# Altium PCB TK106_MIDI_Konnektorer.PcbDoc
Units mm, origin at the board's own origin, x right, y up, seen from the top; angles counter-clockwise.
Board outline 60 x 100 mm, 2 copper layers (Top Layer, Bottom Layer); 32 components, 21 nets, 125 pads, 2 vias.
Unrouted connection lines stored in the file: 51.
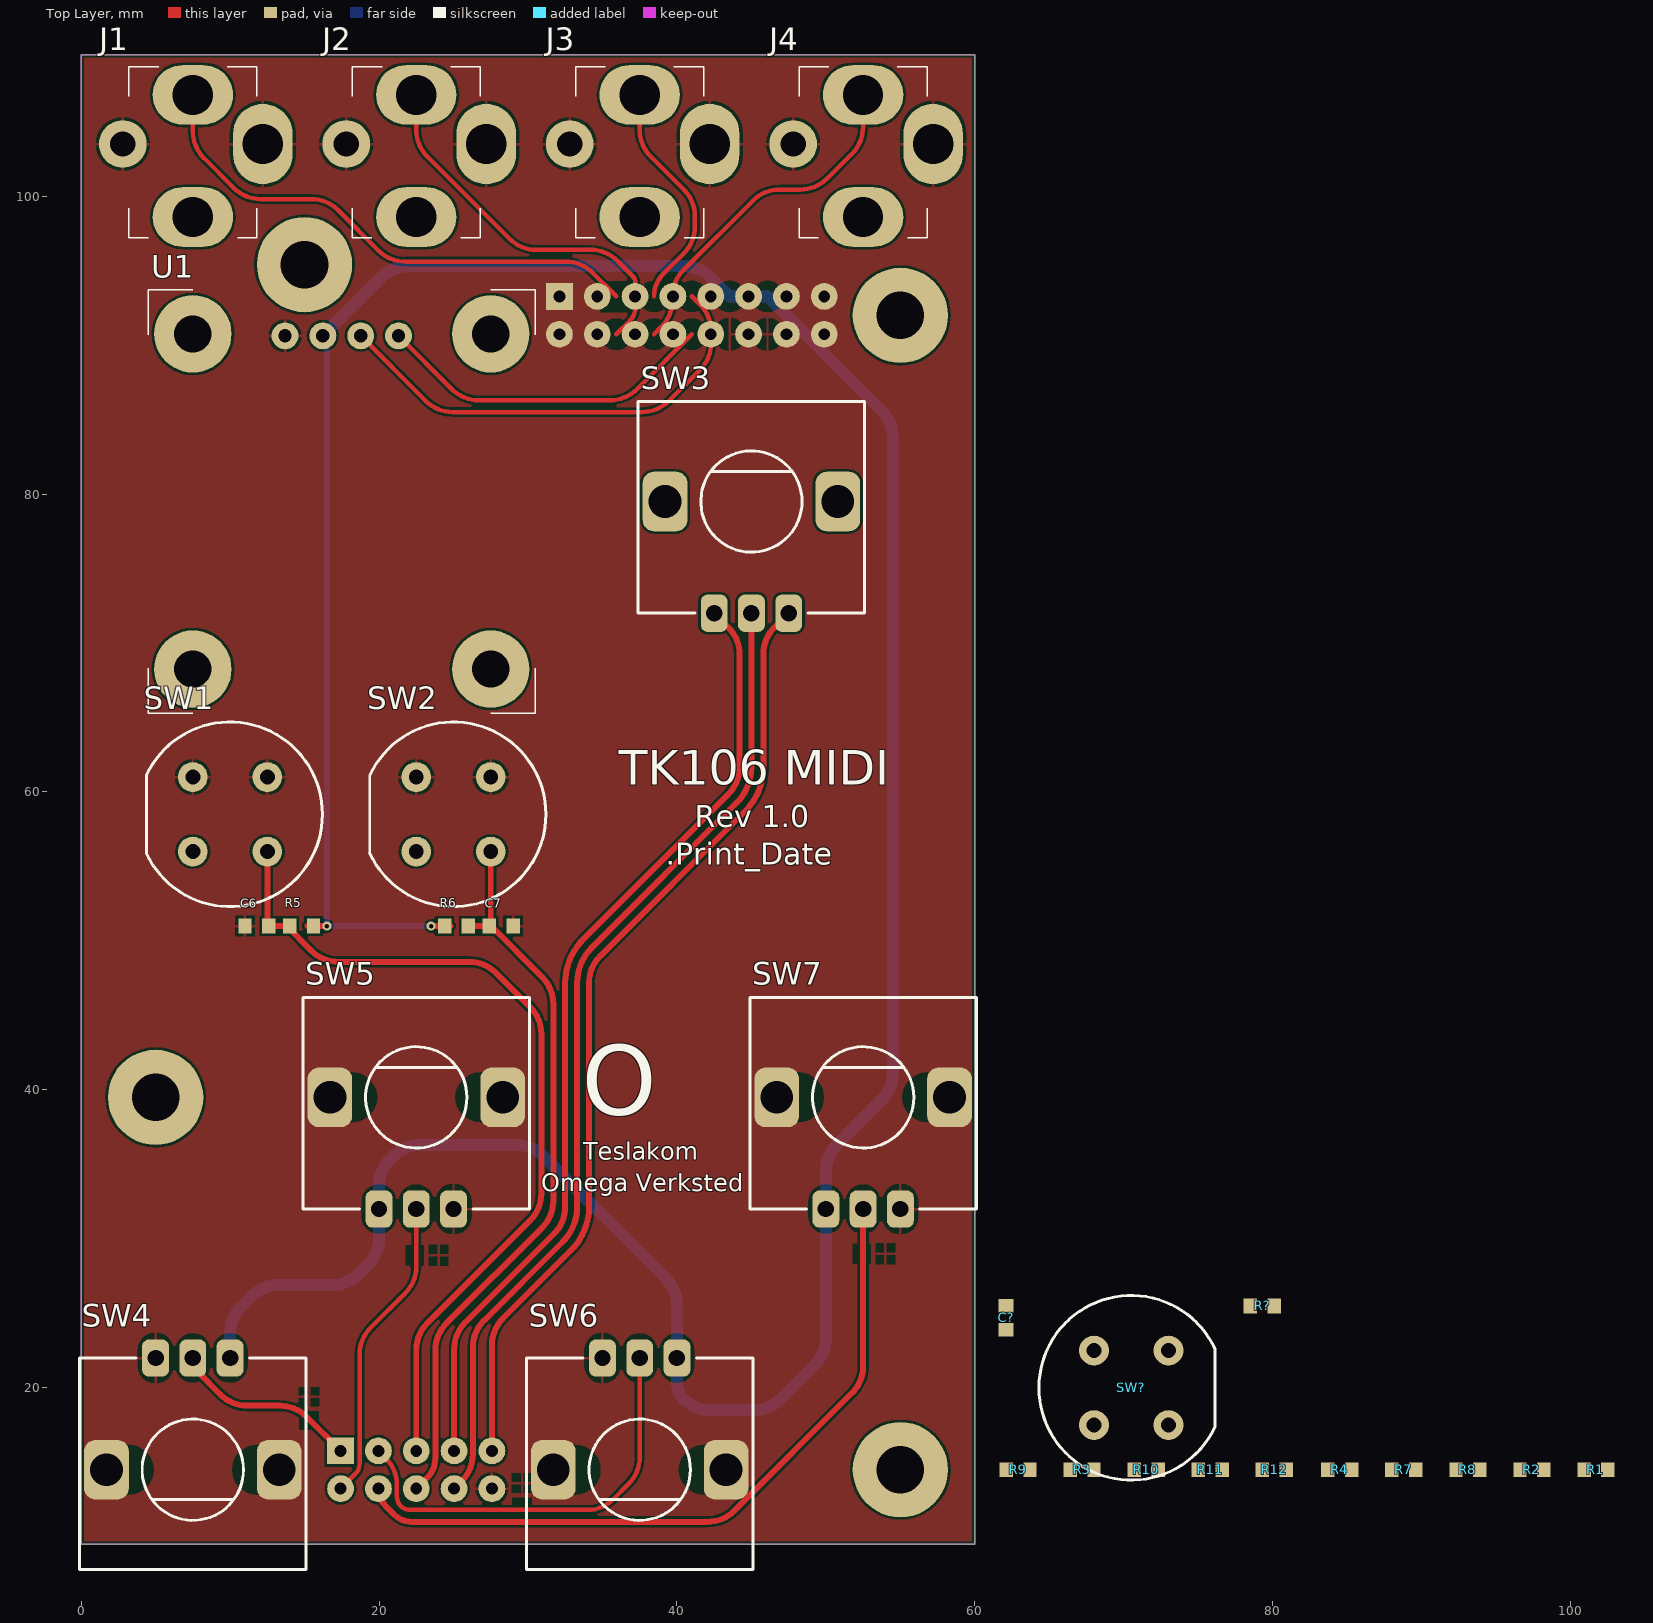
[diagram p0: Top Layer view]
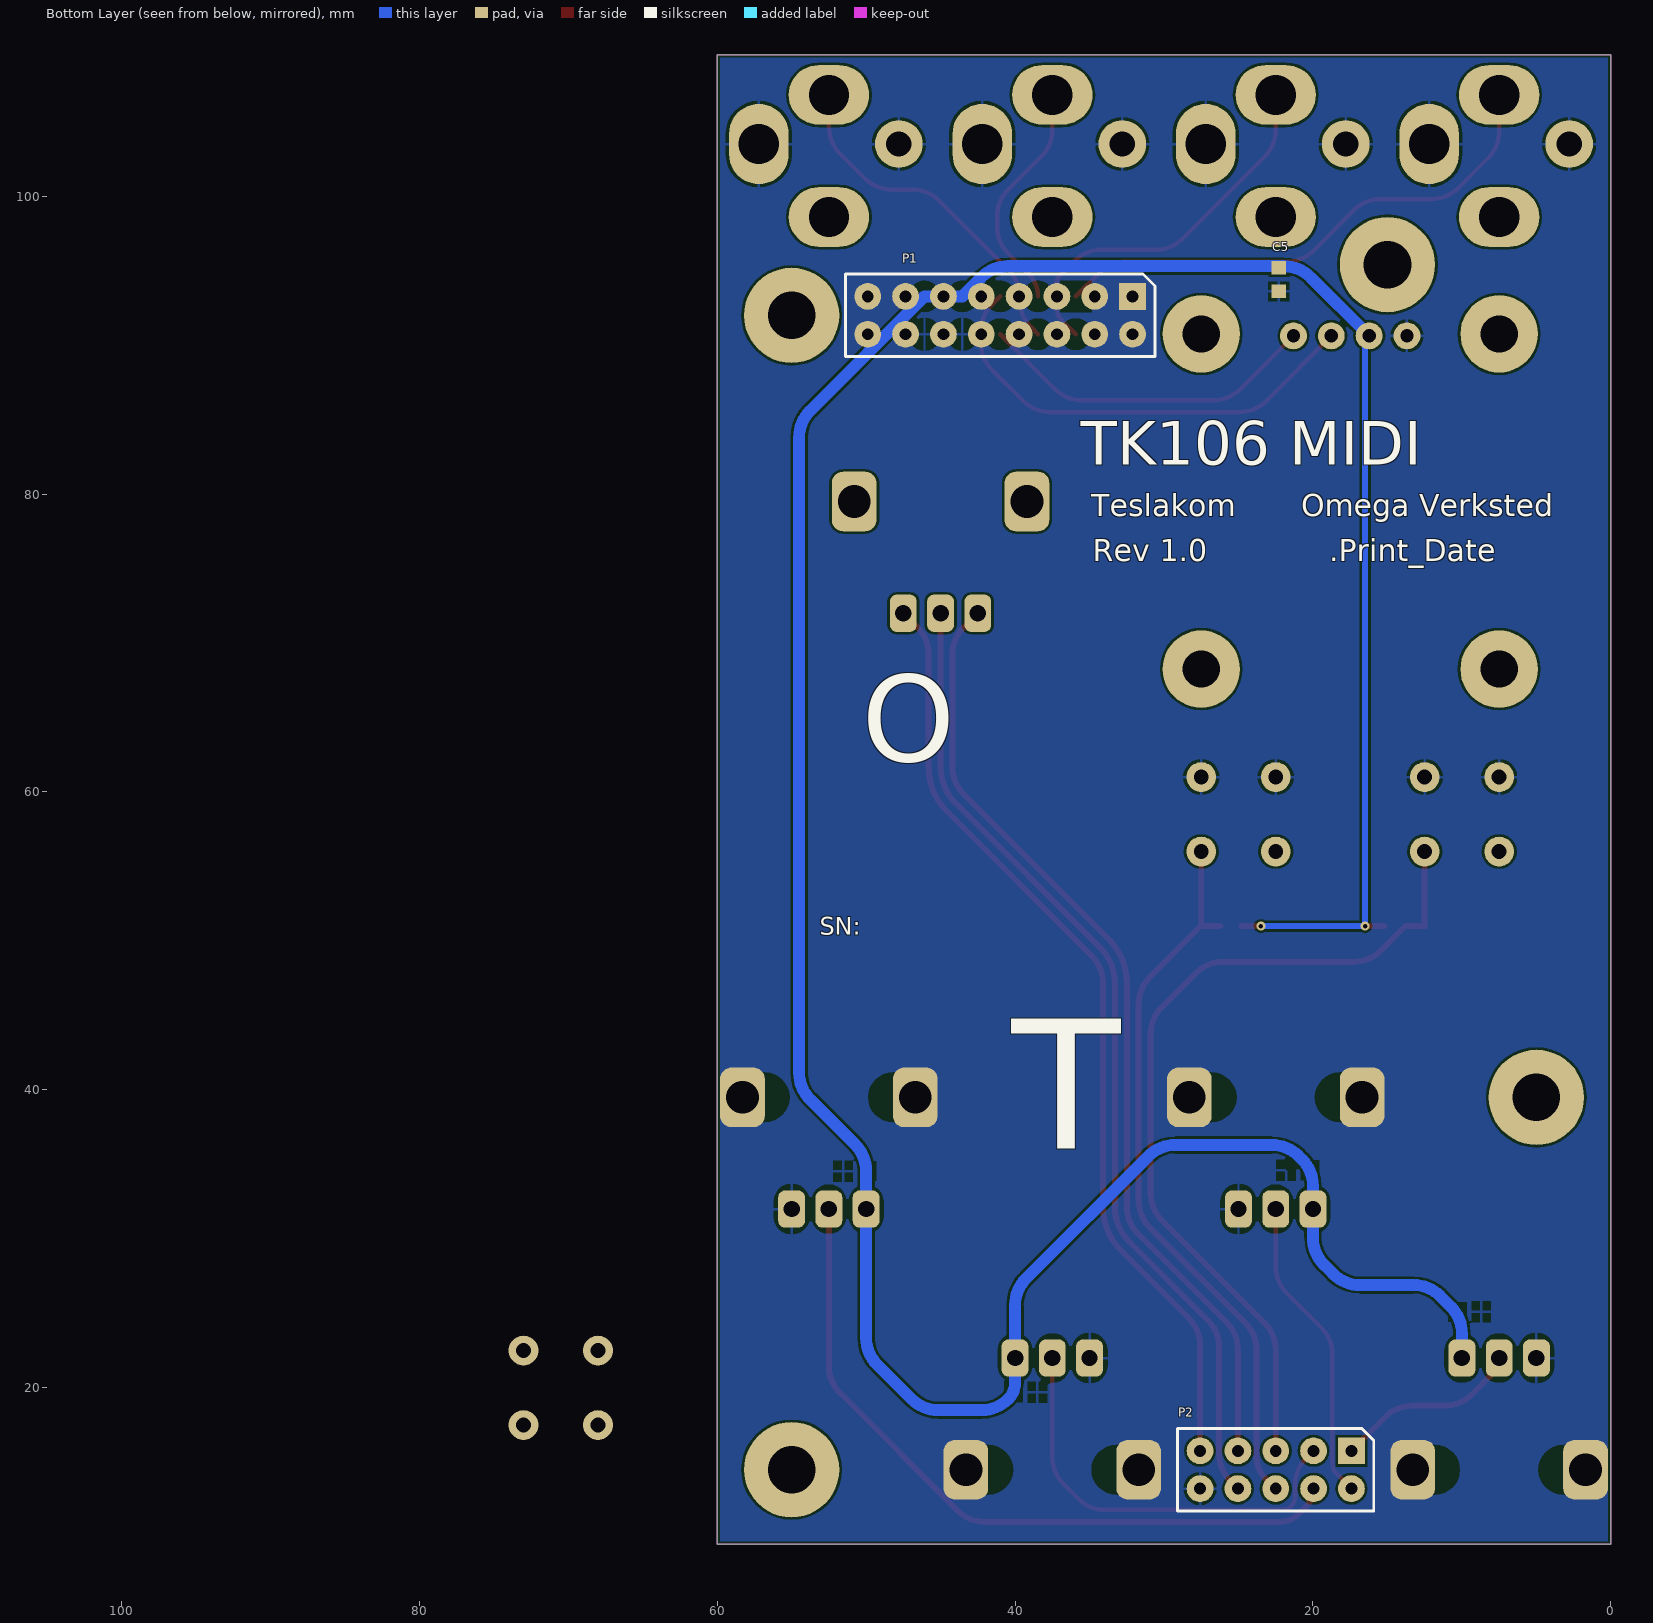
[diagram p1: Bottom Layer view, seen from below]

## Layer stack, top to bottom
Top Solder: solder mask 0.0102, Solder Resist, Dk 3.5
Top Layer: signal copper 0.0356
Dielectric 1: dielectric 0.32, FR-4, Dk 4.8
Bottom Layer: signal copper 0.0356
Bottom Solder: solder mask 0.0102, Solder Resist, Dk 3.5

## Board outline
0,9.5 0,109.5 60,109.5 60,9.5

## Design rules (kind name [scope] priority, off if disabled: settings)
Clearance [All] p1: gap=0.16 ignorepadtopadclearanceinfootprint=FALSE except(0: Arc-Text Arc-Hole Track-Text Track-Hole SMDPad-Text SMDPad-Hole THPad-Text THPad-Hole Via-Text Via-Hole Fill-Text Fill-Hole Poly-Text Poly-Hole Region-Text Region-Hole Text-Text Text-Hole)
Height [All] p1: minheight=0 maxheight=200 prefheight=12.7
HoleSize [All] p1: absolutevalues=TRUE maxlimit=6.35 minlimit=0.3 maxpercent=80.000 minpercent=20.000
MinimumSolderMaskSliver [All] p1: minsoldermaskwidth=0.1
PlaneClearance [All] p1: clearance=1
PlaneConnect [All] p1: planeconnectstyle=Relief reliefexpansion=0.508 reliefentries=4 reliefconductorwidth=1 reliefairgap=0.254
PolygonConnect PolygonConnect_1 [IsVia] p1: connectstyle=Direct reliefconductorwidth=0.254 reliefentries=4 polygonreliefangle="90 Angle" airgapwidth=0.254
PolygonConnect [All] p2: connectstyle=Relief reliefconductorwidth=0.2 reliefentries=4 polygonreliefangle="90 Angle" airgapwidth=0.2
RoutingVias [All] p1: holewidth=0.3 width=0.6 viastyle="Through Hole" minholewidth=0.3 minwidth=0.6 maxholewidth=6.35 maxwidth=10
SilkToSolderMaskClearance [IsPad] p1: minsilkscreentomaskgap=0.178 clearancetoexposedcopper=TRUE
SolderMaskExpansion [All] p1: expansion=0.1 istentingtop=FALSE
Width [All] p1: maxlimit=10 minlimit=0.16 preferedwidth=0.4
24 further rules are at their usual default settings.

## Components (designator, comment, footprint, x,y, rotation, side; value= is the part's Value field where it differs from the comment)
C5 "100nF" CAPC0603(1608)55_N 22.3,94.404 r90 bottom
C6 "100nF" CAPC0603(1608)55_N 11.8,51 r0 top
C7 "100nF" CAPC0603(1608)55_N 28.2,51 r180 top
C? "100nF" CAPC0603(1608)55_N 62.099,24.7 r270 top
J1 "3.5mm jack" PJ301BM 7.5,103.5 r180 top
J2 "3.5mm jack" PJ301BM 22.5,103.5 r180 top
J3 "3.5mm jack" PJ301BM 37.5,103.5 r180 top
J4 "3.5mm jack" PJ301BM 52.5,103.5 r180 top
P1 "Header2x8" HDRV16W64P254_2X8 41,92 r270 bottom
P2 "Header2x5" HDRV10W64P254_2X5 22.5,14.5 r270 bottom
R1 "10k" RESC0603(1608)_N 101.699,14.5 r180 top
R2 "10k" RESC0603(1608)_N 97.399,14.5 r180 top
R3 "10k" RESC0603(1608)_N 67.199,14.5 r180 top
R4 "10k" RESC0603(1608)_N 84.499,14.5 r180 top
R5 "10k" RESC0603(1608)_N 14.8,51 r0 top
R6 "10k" RESC0603(1608)_N 25.2,51 r180 top
R7 "10k" RESC0603(1608)_N 88.799,14.5 r180 top
R8 "10k" RESC0603(1608)_N 93.099,14.5 r180 top
R9 "10k" RESC0603(1608)_N 62.899,14.5 r180 top
R10 "10k" RESC0603(1608)_N 71.499,14.5 r180 top
R11 "10k" RESC0603(1608)_N 75.799,14.5 r180 top
R12 "10k" RESC0603(1608)_N 80.099,14.5 r180 top
R? "10k" RESC0603(1608)_N 79.299,25.5 r180 top
SW1 "D6R90LFS" CK_D6R 10,58.5 r0 top
SW2 "D6R90LFS" CK_D6R 25,58.5 r0 top
SW3 "Rotary Encoder" RotaryEncoder 45,79.5 r0 top
SW4 "Rotary Encoder" RotaryEncoder 7.5,14.5 r180 top
SW5 "Rotary Encoder" RotaryEncoder 22.5,39.5 r0 top
SW6 "Rotary Encoder" RotaryEncoder 37.5,14.5 r180 top
SW7 "Rotary Encoder" RotaryEncoder 52.5,39.5 r0 top
SW? "D6R90LFS" CK_D6R 70.499,20 r180 top
U1 "Oled Display" OLED_SSD1306_I2C 17.5,79.5 r0 top

## Footprints (in the part's own frame and the unit in brackets; to place one, negate y for a bottom-side part, rotate by r counter-clockwise, add the part's x,y. Pads: shape width x height; smd on the part's side, far side on the other; paste and mask are expansions set on the pad)
CAPC0603(1608)55_N [mm] "Chip Capacitor, Body 1.6x0.8mm, Height 0.55mm, IPC Medium Density"
  rect 0.9x1 smd: 1(-0.8,0) 2(0.8,0)
  body extent -0.87,-0.48 0.88,0.47, height 0.55
CK_D6R [mm]
  round 2 hole 1 paste+0: 1(-2.5,2.5) 2(2.5,2.5) 3(-2.5,-2.5) 4(2.5,-2.5)
  silkscreen extent -5.63,-6.2 6.2,6.2, body extent -6,-6 6,6, height 14.3
HDRV10W64P254_2X5 [mm] "Header 2x5"
  rect 1.8x1.8 hole 0.8: 1(-1.27,5.08)
  round 1.8 hole 0.8: 2(1.27,5.08) 3(-1.27,2.54) 4(1.27,2.54) 5(-1.27,0) 6(1.27,0) 7(-1.27,-2.54) 8(1.27,-2.54) 9(-1.27,-5.08) 10(1.27,-5.08)
  silkscreen extent -2.77,-6.6 2.77,6.58, body extent -2.54,-6.35 2.54,6.35, height 8.38
HDRV16W64P254_2X8 [mm] "Header 2x8"
  rect 1.8x1.8 hole 0.8: 1(-1.27,8.89)
  round 1.8 hole 0.8: 2(1.27,8.89) 3(-1.27,6.35) 4(1.27,6.35) 5(-1.27,3.81) 6(1.27,3.81) 7(-1.27,1.27) 8(1.27,1.27) 9(-1.27,-1.27) 10(1.27,-1.27) 11(-1.27,-3.81) 12(1.27,-3.81) 13(-1.27,-6.35) 14(1.27,-6.35) 15(-1.27,-8.89) 16(1.27,-8.89)
  silkscreen extent -2.77,-10.39 2.77,10.39, body extent -2.54,-10.16 2.54,10.16, height 8.38
OLED_SSD1306_I2C [mm]
  round 1.8 hole 0.9 paste+0: 1(-3.81,11.12) 2(-1.27,11.12) 3(1.27,11.12) 4(3.81,11.12)
  round 5.2 hole 2.5 paste+0: ""(-10,-11.25) ""(-10,11.25) ""(10,-11.25) ""(10,11.25)
  silkscreen extent -13,-14.2 13,14.2, body extent -12.5,-13.5 12.5,12.5, height 3.6
PJ301BM [mm]
  oval 4x5.4 hole 2.7 paste+0: 1(-4.7,0)
  round 3.2 hole 1.7 paste+0: 1(4.7,0)
  oval 5.4x4 hole 2.7 paste+0: 2(0,-3.3) 3(0,4.9)
  silkscreen extent -4.3,-5.2 4.3,6.3, body extent -4.9,-4.9 4.9,6, height 16
RESC0603(1608)_N [mm] "Chip Resistor, Body 1.6x0.8mm, IPC Medium Density"
  rect 0.9x1 smd: 1(-0.8,0) 2(0.8,0)
  body extent -0.85,-0.47 0.85,0.47, height 0.6
RotaryEncoder [mm] "ALPS rotary encoder  EC12E2430804"
  rrect50% 1.8x2.5 hole 1.1: 1(0,-7.5) 2(-2.5,-7.5) 3(2.5,-7.5)
  rrect50% 3x4 hole 2.2: 4(-5.8,0) 4(5.8,0)
  silkscreen extent -7.6,-7.5 7.6,6.7, body extent -7,-7.65 7,6.6, height 20.05

## Part data
C5 C6 C7 C?: library part 5152, "X7R 50V 5%", antall=1000, dybde=0, hylle=0, id=5152, komponenttype=2, lager_type=Baklager, leverandor=Farnell, leverandor_varenr=1759122, navn=100nF, nokkelord="Kondensator, Capacitor, CAP", pakke_opprettet="18/02/2015 14:18:13", pakke_opprettet_av=815, pakketype=0603, pris=1, produsent=Multikomp, rad=21, rom=OV, symbol_opprettet="14/11/2014 20:19:34", symbol_opprettet_av=815
J1 J2 J3 J4: library part 4712, "3-pin 3.5mm 1/8\" Mono Jack PCB Panel Mount", beskrivelse="3.5mm Mono jack", id=4712, komponenttype=11, navn=PJ301BM, nokkelord=eurorack, pakke_opprettet="26/06/2019 21:29:25", pakke_opprettet_av=815, pakketype=TH, pris=0, symbol_opprettet="26/06/2019 21:41:38", symbol_opprettet_av=815
P1: library part 4618, beskrivelse=Header, id=4618, komponenttype=11, navn="Header 2X8", nokkelord=Header, pakke_opprettet="14.02.2019 23:39:55", pakke_opprettet_av=815, pakketype=TH, pris=10, symbol_opprettet="13.11.2014 11:08:32", symbol_opprettet_av=815
P2: library part 5660, beskrivelse=Header, id=5660, komponenttype=11, navn="Header 2X5", nokkelord=Header, pakke_opprettet="31/01/2020 22:00:52", pakke_opprettet_av=815, pakketype=TH, pris=5, symbol_opprettet="13/11/2014 11:03:55", symbol_opprettet_av=815
R1 R2 R3 R4 R5 R6 R7 R8 R9 R10 R11 R12 R?: library part 5264, "0.1W 1% Thick film resistor", antall=1200, dybde=3, hylle=6, id=5264, komponenttype=1, lager_type=Baklager, leverandor=Farnell, leverandor_varenr=2447230, navn=10k, nokkelord="Resistor Motstand", pakke_opprettet="08/07/2014 21:15:30", pakke_opprettet_av=815, pakketype=0603, pris=0, produsent=Multikomp, rad=1, rom=OV, symbol_opprettet="08/07/2014 21:16:33", symbol_opprettet_av=815
SW1 SW2 SW?: library part 4720, "Tactile Switch, D6 Series, Top Actuated, Through Hole, Round Button, 130 gf, 100mA", id=4720, leverandor=Farnell, leverandor_varenr=1201375, navn=D6R90LFS, pakke_opprettet="27/06/2019 21:16:30", pakke_opprettet_av=815, pris=8, produsent=C&K, symbol_opprettet="14/11/2014 21:57:30", symbol_opprettet_av=815
SW3 SW4 SW5 SW6 SW7: library part 4370, "EC12E2430804 Incremental rotary encoder", id=4370, leverandor=Farnell, leverandor_varenr=2065070, navn="Rotary Encoder", pakke_opprettet="03/11/2017 13:12:58", pakke_opprettet_av=1150, pakketype=TH, pris=15, produsent=Alps, symbol_opprettet="03/11/2017 13:12:00", symbol_opprettet_av=1150
U1: library part 4719, "White 3-5V 0.96\"I2C Serial 128X64 OLED LCD LED Display Module for Arduino. Driver: SSD1306, gm009605v4", antall=16, dybde=0, hylle=4, id=4719, lager_type=Baklager, navn="Oled Display", nokkelord="I2C, Serial, 128X64, OLED, Display", pakke_opprettet="26/06/2019 22:49:09", pakke_opprettet_av=815, pakketype=-, pris=20, rad=6, rom=OV, symbol_opprettet="26/06/2019 22:55:07", symbol_opprettet_av=815

## Free pads (board coordinates)
  round 6.4 hole 3.2 unplated: 0(5,39.5) 0(15,95.4) 0(55,14.5) 0(55,92)

## Via types
v1: diameter 0.6, hole 0.3, Top Layer to Bottom Layer, tented both sides, 2 vias

## Nets (pads, with @x,y where several pads share a name; then routed paths per layer and width w, separated by ;. In a path a pad name is that pad's centre, name@x,y a point inside that pad or via, vN(x,y) a via of type N, cw(c..) or ccw(c..) an arc to the next point about the centre after c; other vN are vias at no path point)
BTN_CANCEL: C7.2 P1.14 R6.1 SW2.4 | length 49.2
  Top Layer w0.4: 22.5,13.23 23.24,13.97 ccw(c21.936,15.274) 23.78,15.274 23.78,22.528 cw(c26.32,22.528) 24.524,24.324 30.956,30.756 ccw(c29.16,32.552) 31.7,32.552 31.7,45.773 ccw(c29.16,45.773) 30.956,47.569 C7.2@27.525,51 ; R6.1@26.2,51 C7.2@27.525,51 ; SW2.4 27.5,51.06 ccw(c27.585,51.06) C7.2@27.525,51
BTN_MUTE: C?.2 P1.12 R?.1 SW?.4
BTN_OK: C6.2 P1.16 R5.1 SW1.4 | length 58
  Top Layer w0.4: SW1.4 12.5,51.06 cw(c12.415,51.06) 12.475,51 13.8,51 15.456,49.344 ccw(c17.252,51.14) 17.252,48.6 26.048,48.6 cw(c26.048,46.06) 27.844,47.856 30.156,45.544 cw(c28.36,43.748) 30.9,43.748 30.9,33.052 cw(c28.36,33.052) 30.156,31.256 23.244,24.344 ccw(c25.04,22.548) 22.5,22.548 22.5,15.77
ENC_A: P1.11 R1.1 SW3.2 | length 64.3
  Top Layer w0.4: 25.04,15.77 25.04,22.588 cw(c27.58,22.588) 25.784,24.384 31.756,30.356 ccw(c29.96,32.152) 32.5,32.152 32.5,47.185 cw(c36.64,47.185) 33.713,50.113 43.456,59.856 ccw(c41.66,61.652) 44.2,61.652 44.2,69.248 ccw(c41.66,69.248) 43.456,71.044 SW3.2
ENC_ATTACK_A: P2.1 R3.1 SW4.2
ENC_ATTACK_B: P2.3 R9.1 SW4.3
ENC_B: P1.13 R2.1 SW3.3 | length 63.8
  Top Layer w0.4: 27.58,15.77 27.58,22.865 cw(c30.12,22.865) 28.324,24.661 32.887,29.225 ccw(c29.96,32.152) 34.1,32.152 34.1,47.185 cw(c36.64,47.185) 34.844,48.981 44.587,58.725 ccw(c41.66,61.652) 45.8,61.652 45.8,69.248 cw(c48.34,69.248) 46.544,71.044 SW3.3
ENC_DECAY_A: P2.5 R4.1 SW5.2
ENC_DECAY_B: P2.7 R10.1 SW5.3
ENC_RELEASE_A: P2.8 R8.1 SW7.2
ENC_RELEASE_B: P2.6 R12.1 SW7.3
ENC_SUSTAIN_A: P2.9 R7.1 SW6.2
ENC_SUSTAIN_B: P2.10 R11.1 SW6.3
GND: C5.1 C6.1 C7.1 C?.1 J1.1 J2.1 J3.1 J4.1 P1.8 P1.10 P2.2 SW1.1 SW1.2 SW2.1 SW2.2 SW3.1 SW4.1 SW5.1 SW6.1 SW7.1 SW?.1 SW?.2 U1.1 | length 20.6
  Top Layer w0.3: P2.2 18.411,14.221 ccw(c17.712,14.919) 18.7,14.919 18.7,22.248 cw(c21.24,22.248) 19.444,24.044 21.756,26.356 ccw(c19.96,28.152) 22.5,28.152 SW5.1
OUT_1: J1.2 P1.1 | length 35.5
  Top Layer w0.3: J1.2 7.5,104.352 ccw(c10.04,104.352) 8.244,102.556 10.256,100.544 ccw(c12.052,102.34) 12.052,99.8 15.462,99.8 cw(c15.462,97.26) 17.258,99.056 19.97,96.344 ccw(c21.766,98.14) 21.766,95.6 32.538,95.6 cw(c32.538,93.06) 34.334,94.856 35.92,93.27
OUT_2: J2.2 P1.2 | length 25.7
  Top Layer w0.3: J2.2 22.5,104.452 ccw(c25.04,104.452) 23.244,102.656 28.756,97.144 ccw(c30.552,98.94) 30.552,96.4 34.204,96.4 cw(c34.204,93.86) 36,95.656 37.063,94.593 cw(c36.734,94.263) 37.2,94.263 37.2,92.465 cw(c36.102,92.465) 36.879,91.689 35.92,90.73
OUT_3: J3.2 P1.3 | length 15.8
  Top Layer w0.3: J3.2 37.5,104.452 ccw(c40.04,104.452) 38.244,102.656 40.456,100.444 cw(c38.66,98.648) 41.2,98.648 41.2,97.952 cw(c38.66,97.952) 40.456,96.156 39.089,94.789 ccw(c40.609,93.27) 38.46,93.27
OUT_4: J4.2 P1.4 | length 23.4
  Top Layer w0.3: 38.46,90.73 38.956,91.226 ccw(c37.16,93.022) 39.7,93.022 39.7,93.27 cw(c42.187,93.27) 40.428,95.028 45.1,99.7 cw(c46.896,97.904) 46.896,100.444 48.292,100.444 ccw(c48.292,102.984) 50.088,101.188 51.756,102.856 ccw(c49.96,104.652) 52.5,104.652 J4.2
SCK: P1.5 U1.3 | length 31.4
  Top Layer w0.3: U1.3 23.146,86.244 ccw(c24.942,88.04) 24.942,85.5 37.648,85.5 ccw(c37.648,88.04) 39.444,86.244 41.556,88.356 ccw(c39.76,90.152) 42.3,90.152 42.3,90.918 ccw(c39.76,90.918) 41.556,92.714 41,93.27
SDA: P1.6 U1.4 | length 23.1
  Top Layer w0.3: U1.4 24.886,87.044 ccw(c26.682,88.84) 26.682,86.3 35.518,86.3 ccw(c35.518,88.84) 37.314,87.044 41,90.73
VCC_P5V0: C5.2 P1.7 P1.9 R1.2 R2.2 R3.2 R4.2 R5.2 R6.2 R7.2 R8.2 R9.2 R10.2 R11.2 R12.2 R?.2 U1.2 | length 220.2
  Top Layer w0.4: R5.2@15.2,51 v1(16.5,51) ; v1(23.5,51) R6.2@24.8,51
  Bottom Layer w0.4: U1.2 cw(c15.578,89.968) 16.5,89.968 v1(16.5,51) v1(23.5,51)
  Bottom Layer w0.8: 10,22 10,23.648 cw(c12.54,23.648) 10.744,25.444 11.456,26.156 cw(c13.252,24.36) 13.252,26.9 16.848,26.9 ccw(c16.848,29.44) 18.644,27.644 19.256,28.256 ccw(c17.46,30.052) 20,30.052 20,32 20,33.548 cw(c22.54,33.548) 20.744,35.344 20.956,35.556 cw(c22.752,33.76) 22.752,36.3 29.248,36.3 cw(c29.248,33.76) 31.044,35.556 39.256,27.344 cw(c37.46,25.548) 40,25.548 40,22 40,20.345 ccw(c41.557,20.345) 40.456,19.244 ccw(c42.252,21.04) 42.252,18.5 45.148,18.5 ccw(c45.148,21.04) 46.944,19.244 49.256,21.556 ccw(c47.46,23.352) 50,23.352 50,32 50,34.548 cw(c52.54,34.548) 50.744,36.344 53.756,39.356 ccw(c51.96,41.152) 54.5,41.152 54.5,83.798 ccw(c51.96,83.798) 53.756,85.594 46.08,93.27 43.54,93.27 42.254,94.556 ccw(c40.458,92.76) 40.458,95.3 21.962,95.3 ccw(c21.962,92.76) 20.166,94.556 U1.2
pads on no net: J1.3 J2.3 J3.3 J4.3 P1.15 P2.4 SW1.3 SW2.3 SW3.4 SW4.4 SW5.4 SW6.4 SW7.4 SW?.3 U1.
copper on no net: | length 156.8
  Top Layer w0.3: 19.96,15.77 20.456,15.274 cw(c18.66,13.478) 21.2,13.478 21.2,12.7 ccw(c22.1,12.7) 22.1,11.8 34,11.8 ccw(c34,14.214) 35.707,12.507 36.756,13.556 ccw(c34.96,15.352) 37.5,15.352 37.5,22
  Top Layer w0.4: 7.5,22 ccw(c8.949,22) 7.924,20.976 9.356,19.544 ccw(c11.152,21.34) 11.152,18.8 13.338,18.8 cw(c13.338,16.26) 15.134,18.056 17.42,15.77 ; 19.96,13.23 ccw(c21.626,13.23) 20.448,12.052 21.012,11.488 ccw(c22.19,12.666) 22.19,11 42.048,11 ccw(c42.048,13.54) 43.844,11.744 51.756,19.656 ccw(c49.96,21.452) 52.5,21.452 52.5,32 ; 25.04,13.23 25.556,13.746 ccw(c23.76,15.542) 26.3,15.542 26.3,22.717 cw(c28.84,22.717) 27.044,24.513 32.322,29.79 ccw(c29.96,32.152) 33.3,32.152 33.3,47.185 cw(c36.64,47.185) 34.278,49.547 44.022,59.29 ccw(c41.66,61.652) 45,61.652 45,72

## Polygon pours and split planes (outlines as drawn)
GND on Top Layer "GND" (solid, pour order 0): 0,9.5 0,109.5 60,109.5 60,9.5
GND on Bottom Layer "GND" (solid, pour order 2): 0,9.5 0,109.5 60,109.5 60,9.5

## Keep-outs
Keep-Out Layer:
  the board outline again, w0.1

## Silkscreen, mask and mechanical layers (free items; w line width, h text height)
Top Overlay:
  text "TK106 MIDI" at 36.1,59.7 h4
  text "Rev 1.0" at 41.2,57.113 h2.5
  text ".Print_Date" at 39.25,54.613 h2.5
  text "O" at 33.6,36.8 h8
  text "Teslakom" at 33.7,34.9 h2
  text "Omega Verksted" at 30.9,32.8 h2
Bottom Overlay:
  text "TK106 MIDI" at 35.6,81 h5
  text "Omega Verksted" at 20.8,78 h2.5
  text "Teslakom" at 34.9,78 h2.5
  text ".Print_Date" at 18.9,75 h2.5
  text "Rev 1.0" at 34.8,75 h2.5
  text "O" at 50.3,60.1 h10
  text "SN:" at 53.1,50 h2
  text "T" at 32.9,33.2 h15
Mechanical 1:
  the board outline again, w0.1